# Altium PCB PCB1.PcbDoc
Units mil, origin at the board's own origin, x right, y up, seen from the top; angles counter-clockwise.
Board outline 2265.03 x 1595.03 mil, 2 copper layers (Top Layer, Bottom Layer); 36 components, 33 nets, 130 pads, 23 vias.
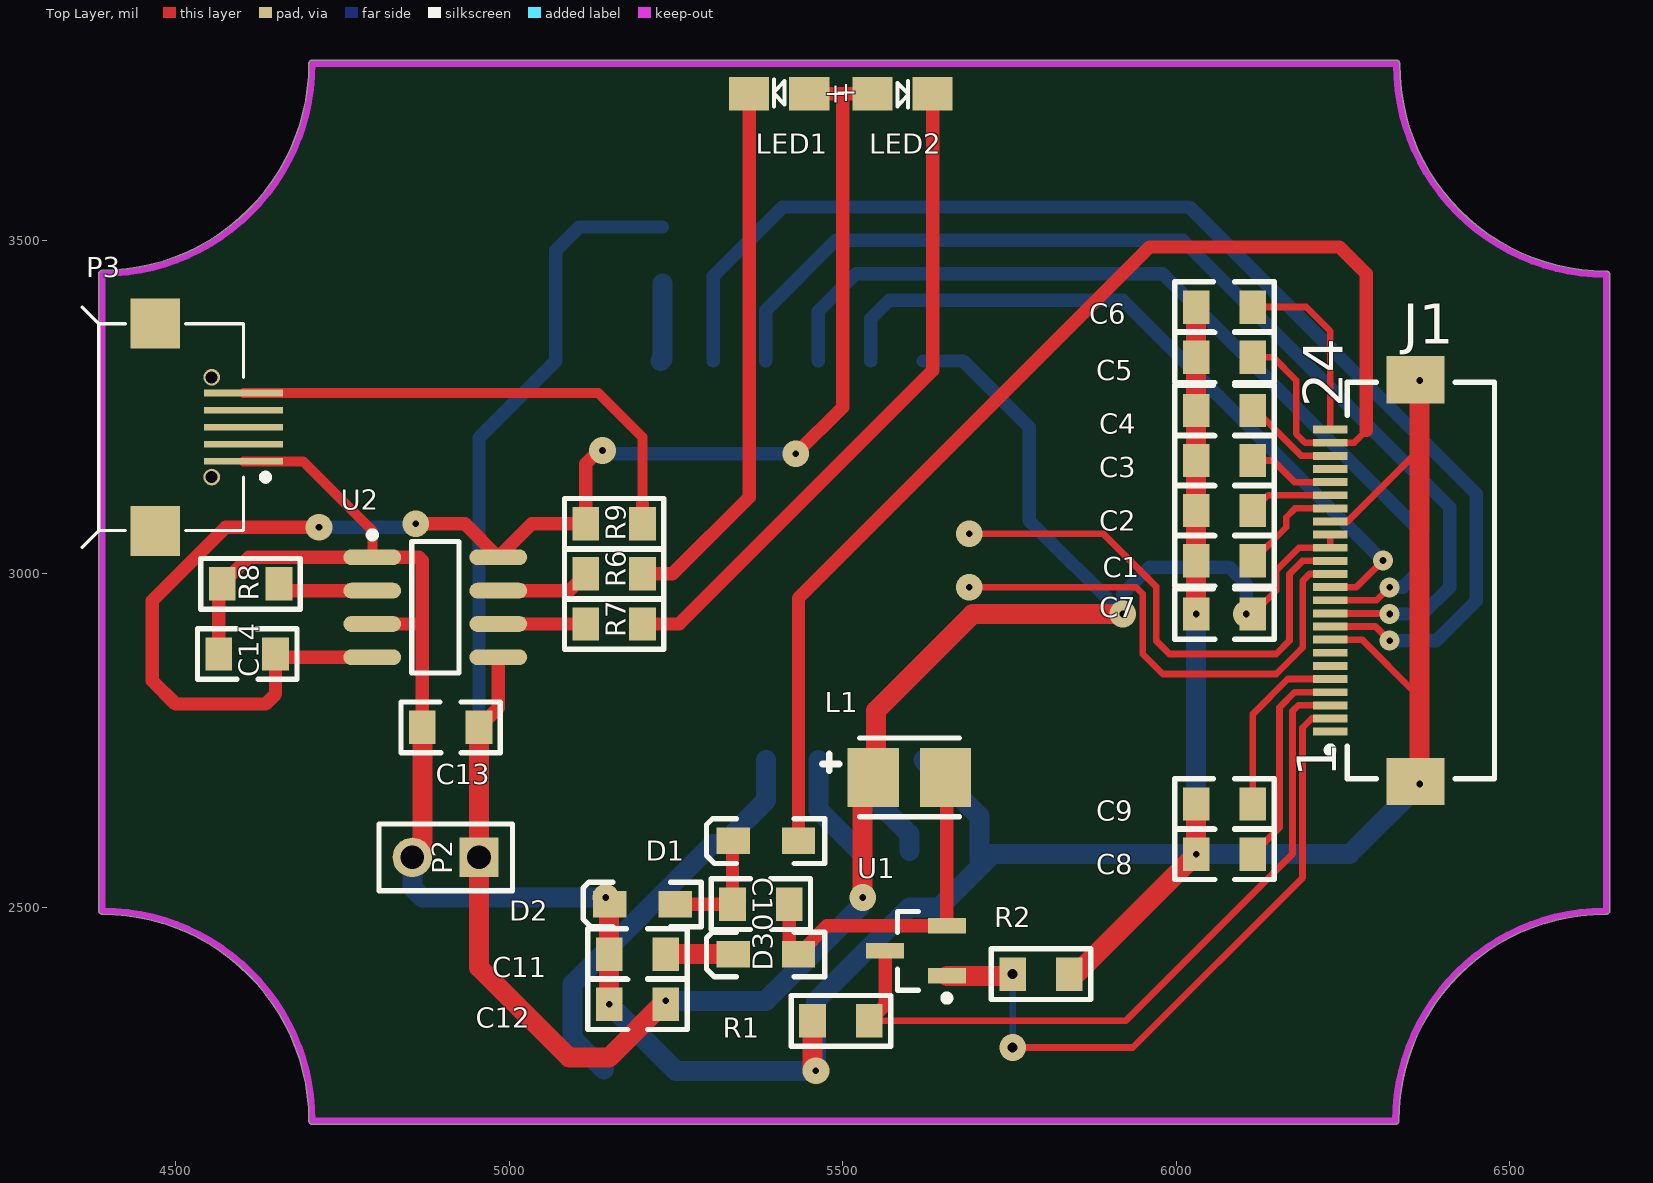
[diagram p0: Top Layer view]
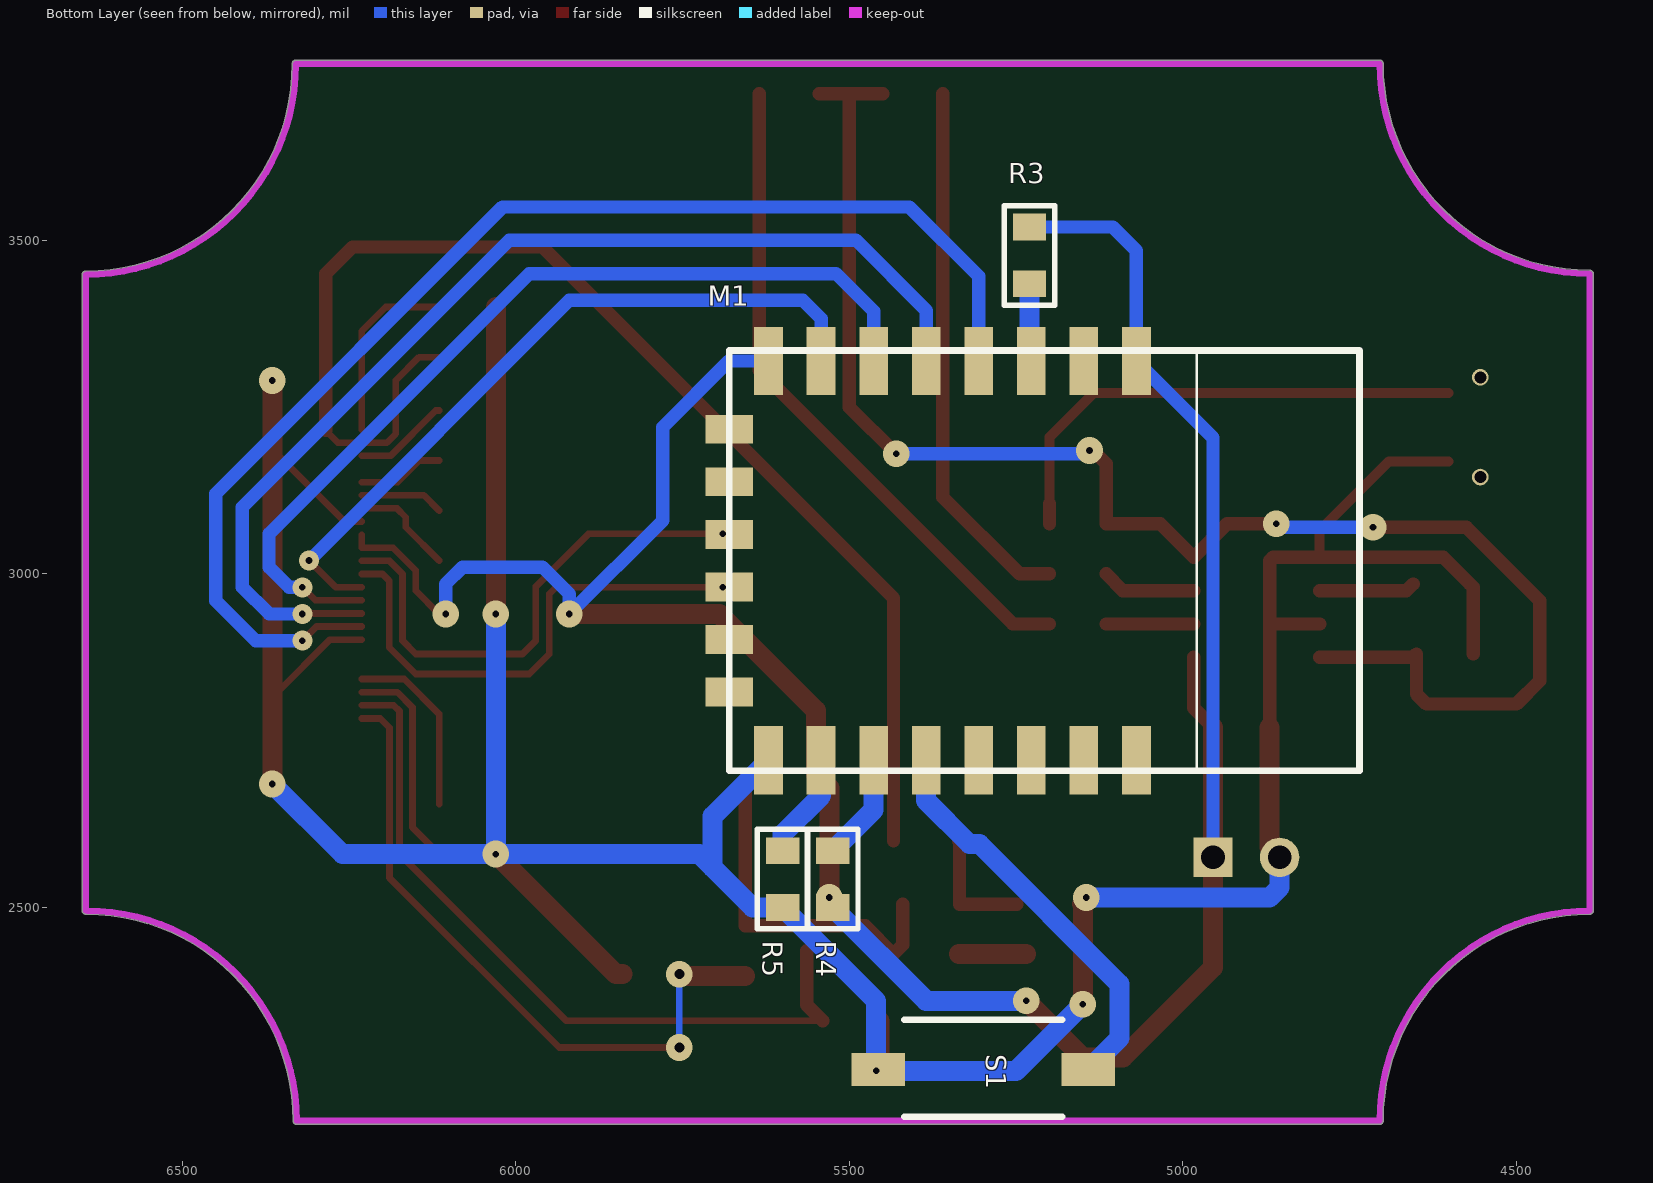
[diagram p1: Bottom Layer view, seen from below]
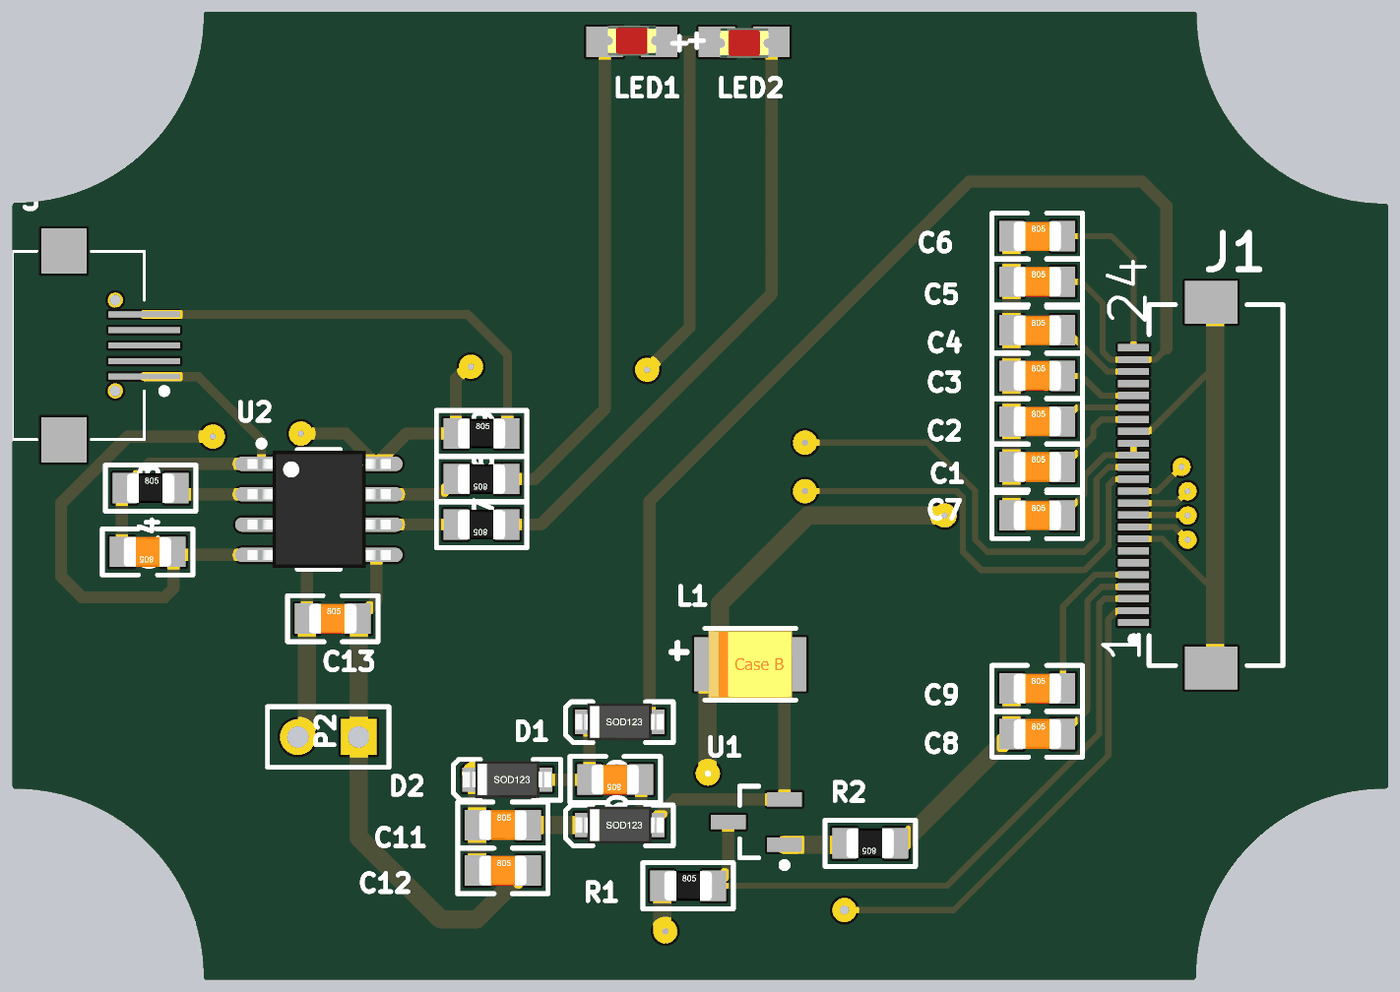
[diagram p2: 3D render of the assembled board from above, using the file's embedded part models]
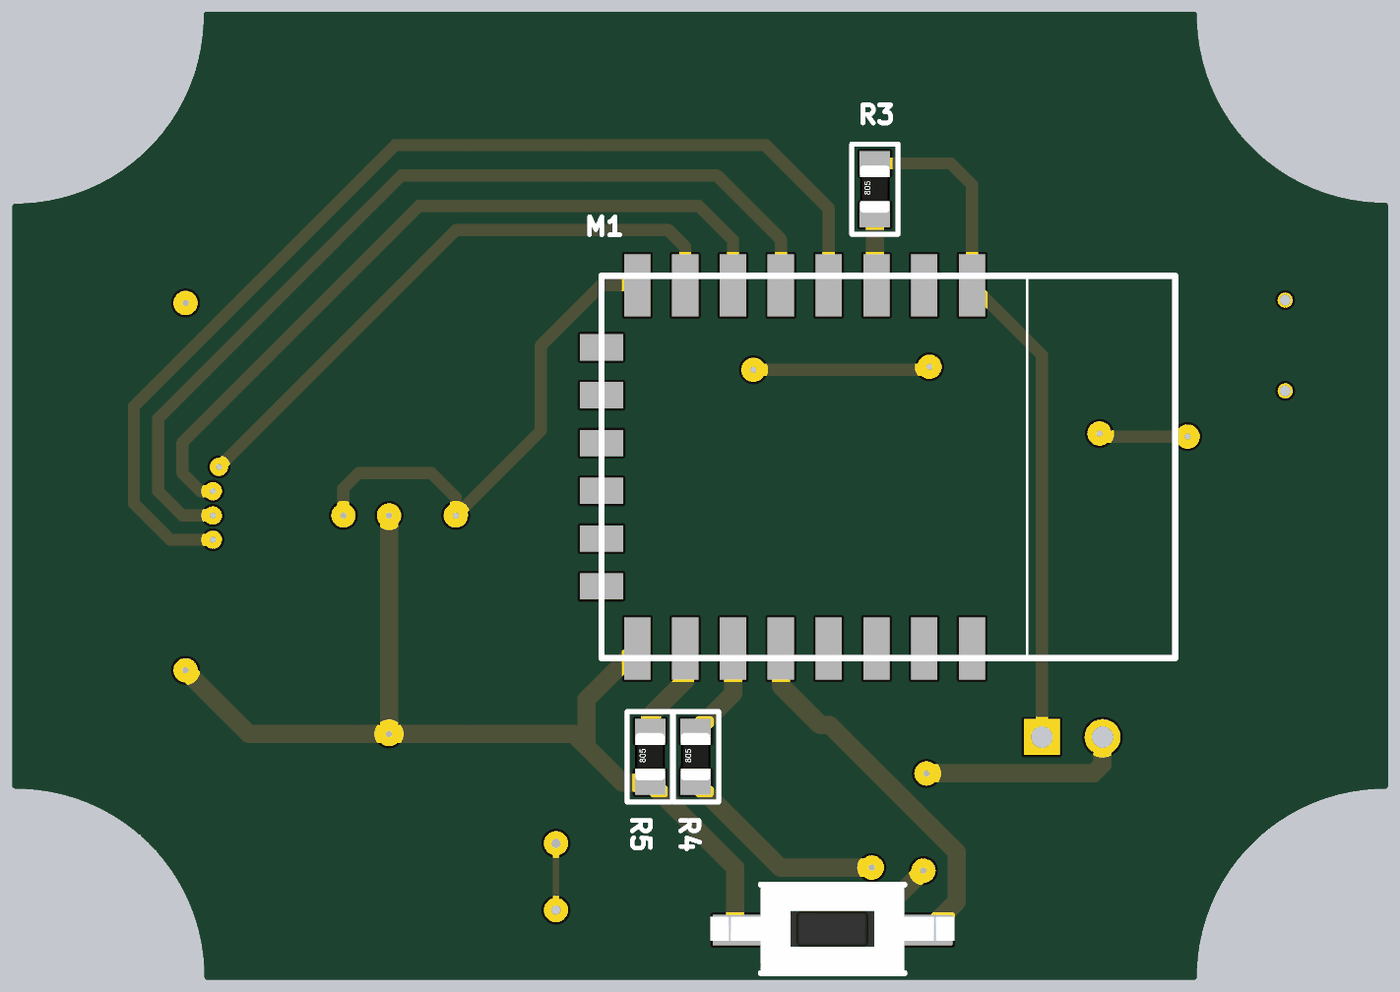
[diagram p3: 3D render of the assembled board from below, using the file's embedded part models]

## Layer stack, top to bottom
Top Solder: solder mask 0.4, Solder Resist, Dk 3.5
Top Layer: signal copper 1.4
Dielectric 1: dielectric 12.6, FR-4, Dk 4.8
Bottom Layer: signal copper 1.4
Bottom Solder: solder mask 0.4, Solder Resist, Dk 3.5

## Board outline
4384.98,2494.96 ccw(c4390,2494.96) 4390,2489.95 cw(c4390,2180) 4699.95,2180 ccw(c4704.96,2180) 4704.96,2174.99 6328.74,2174.99 ccw(c6328.74,2180) 6333.76,2180 cw(c6643.7,2180) 6643.7,2489.95 ccw(c6643.7,2494.96) 6644.35,2489.99 ccw(c6645,2494.96) 6650.02,2494.96 6650.02,3448.74 ccw(c6645,3448.74) 6645,3453.76 cw(c6645,3763.7) 6335.05,3763.7 ccw(c6330.04,3763.7) 6335.01,3764.35 ccw(c6330.04,3765) 6335.05,3765 ccw(c6330.04,3765) 6330.04,3770.01 4705,3770.01 ccw(c4705,3765) 4704.98,3770.01 ccw(c4704.96,3765) 4699.95,3765 cw(c4390,3765) 4390,3455.05 ccw(c4390,3450.04) 4384.98,3450.02 ccw(c4390,3450) 4384.98,3450

## Design rules (kind name [scope] priority, off if disabled: settings)
Clearance [All] p1: gap=5
PolygonConnect [All] p1: connectstyle=Relief reliefconductorwidth=10 reliefentries=4 polygonreliefangle="90 Angle" airgapwidth=10
RoutingVias [All] p1: holewidth=28 width=50 viastyle="Through Hole" minholewidth=28 minwidth=50 maxholewidth=28 maxwidth=50
SolderMaskExpansion [All] p1: expansion=4
Width [All] p1: maxlimit=50 minlimit=10 preferedwidth=15
30 further rules are at their usual default settings.

## Components (designator, comment, footprint, x,y, rotation, side; value= is the part's Value field where it differs from the comment)
C1 "无极性电容" 0805C 6030,3020 r0 top
C2 "无极性电容" 0805C 6030,3095 r0 top
C3 "无极性电容" 0805C 6030,3170 r0 top
C4 "无极性电容" 0805C 6030,3245 r0 top
C5 "无极性电容" 0805C 6030,3325 r0 top
C6 "无极性电容" 0805C 6030,3400 r0 top
C7 "无极性电容" 0805C 6030,2940 r0 top
C8 "无极性电容" 0805C 6030,2580 r0 top
C9 "无极性电容" 0805C 6030,2655 r0 top
C10 "无极性电容" 0805C 5420,2505 r180 top
C11 "无极性电容" 0805C 5150,2430 r0 top
C12 "无极性电容" 0805C 5150,2355 r0 top
C13 "无极性电容" 0805C 4870,2770 r0 top
C14 "无极性电容" 0805C 4650,2880 r180 top
D1 "1N5817-肖特基二极管_1" SOD123 5385,2600 r180 top
D2 "1N5817-肖特基二极管_1" SOD123 5200,2505 r180 top
D3 "1N5817-肖特基二极管_1" SOD123 5385,2430 r180 top
J1 "CL586-0555-2" FH12-24S-0.5SH 6295,2990 r90 top
L1 "Inductor" CAPM-B-3528X21N 5600,2695 r0 top
LED1 "LED-贴片-直插" LED_0805 5450,3720 r180 top
LED2 "LED-贴片-直插" LED_0805 5545,3720 r0 top
M1 "ESP-12E&F Module" "ESP-12E&F Module" 5375,3020 r270 bottom
P2 "锂电池" HDR1X2 4955,2575 r180 top
P3 "迷你USB" 迷你usb 4385,3220 r180 top
R1 "贴片电阻" 0805R 5455,2330 r0 top
R2 "贴片电阻" 0805R 5840,2400 r180 top
R3 "贴片电阻" 0805R 5230,3435 r90 bottom
R4 "贴片电阻" 0805R 5525,2500 r90 bottom
R5 "贴片电阻" 0805R 5600,2500 r90 bottom
R6 "贴片电阻" 0805R 5200,3000 r180 top
R7 "贴片电阻" 0805R 5200,2925 r180 top
R8 "贴片电阻" 0805R 4570,2985 r0 top
R9 "贴片电阻" 0805R 5115,3075 r0 top
S1 "SW-2A" SW贴片-3*6*2.5 5300,2440 r180 bottom
U1 "AO3400" AO3400 5610,2435 r180 top
U2 "TP4056" SOP8LM386 4795,3025 r0 top

## Footprints (in the part's own frame and the unit in brackets; to place one, negate y for a bottom-side part, rotate by r counter-clockwise, add the part's x,y. Pads: shape width x height; smd on the part's side, far side on the other; paste and mask are expansions set on the pad)
0805C [mil]
  rect 40x50 smd: 1(0,0) 2(85,0)
  silkscreen extent -32,-38 117,38, body extent 3,-25 82,25, height 30
0805R [mil]
  rect 40x50 smd: 1(0,0) 2(85,0)
  silkscreen extent -32,-38 117,38, body extent 3,-25 82,25, height 30
AO3400 [mm]
  rect 1.45x0.6 smd: 1(-1.175,0.95) 2(-1.175,-0.95) 3(1.175,0)
  silkscreen extent -1.3,-1.5 0.7,1.92, body extent -0.7,-1.5 0.7,1.5, height 1.1
CAPM-B-3528X21N [mm] "Molded Capacitor, 2-Leads, Body 3.50x2.80mm, IPC Medium Density"
  rect 1.95x2.25 smd: 1(-1.375,0) 2(1.375,0)
  silkscreen extent -3.3,-1.5 1.9,1.5, body extent -1.75,-1.4 1.75,1.4, height 1.9
"ESP-12E&F Module" [mm]
  rect 2.6x1.1 smd: 1(-7.6,7.75) 2(-7.6,5.75) 3(-7.6,3.75) 4(-7.6,1.75) 5(-7.6,-0.25) 6(-7.6,-2.25) 7(-7.6,-4.25) 8(-7.6,-6.25) 15(7.6,-6.25) 16(7.6,-4.25) 17(7.6,-2.25) 18(7.6,-0.25) 19(7.6,1.75) 20(7.6,3.75) 21(7.6,5.75) 22(7.6,7.75)
  rect 1.1x1.8 smd: 9(-5,-7.75) 10(-3,-7.75) 11(-1,-7.75) 12(1,-7.75) 13(3,-7.75) 14(5,-7.75)
  silkscreen extent -8,-7.75 8,16.25
FH12-24S-0.5SH [mm] "Connector; FH12 Series; 24 Position; 0.5mm Spaced Bottom Contact"
  rect 0.3x1.3 smd: 1(-5.75,1.625) 2(-5.25,1.625) 3(-4.75,1.625) 4(-4.25,1.625) 5(-3.75,1.625) 6(-3.25,1.625) 7(-2.75,1.625) 8(-2.25,1.625) 9(-1.75,1.625) 10(-1.25,1.625) 11(-0.75,1.625) 12(-0.25,1.625) 13(0.25,1.625) 14(0.75,1.625) 15(1.25,1.625) 16(1.75,1.625) 17(2.25,1.625) 18(2.75,1.625) 19(3.25,1.625) 20(3.75,1.625) 21(4.25,1.625) 22(4.75,1.625) 23(5.25,1.625) 24(5.75,1.625)
  rect 1.8x2.2 smd: 25(-7.65,-1.625) 26(7.65,-1.625)
  silkscreen extent -7.55,-4.62 7.55,1.75
HDR1X2 [mm] "Connector; Header; 2 Position"
  rect 1.5x1.5 hole 0.9: 1(0,0)
  round 1.5 hole 0.9: 2(2.54,0)
  silkscreen extent -1.27,-1.27 3.81,1.27
LED_0805 [mil]
  rect 60x50 smd: 1(0,0) 2(90,0)
  silkscreen extent 37,-21 53,19, body extent 5,-27 85,23, height 43
SOD123 [mil]
  rect 50x40 smd: 1(-49,0) 2(49,0)
  silkscreen extent -88,-33 89,34, body extent -72,-31 73,31, height 53
SOP8LM386 [mm]
  oval 2.2x0.6 smd: 1(0,0) 2(0,-1.27) 3(0,-2.54) 4(0,-3.81) 5(4.8,-3.81) 6(4.8,-2.54) 7(4.8,-1.27) 8(4.8,0)
  silkscreen extent -0.12,-4.41 3.3,0.97, body extent -0.59,-4.36 5.41,0.55, height 1.75
SW贴片-3*6*2.5 [mil] "SMT LED; 2 Flat Leads"
  rect 80x50 smd: 1(158,-183) 2(-156.96,-183)
  silkscreen extent -118,-254 119,-108, body extent -201,-250 201,-112, height 169
迷你usb [mm]
  rect 3x0.25 smd: 1(-5.508,1.3) 2(-5.508,0.65) 3(-5.508,0) 4(-5.508,-0.65) 5(-5.508,-1.3)
  round 0.635 hole 0.457 unplated: MH1(-4.3,1.9) MH2(-4.3,-1.9)
  rect 1.9x1.9 smd: ""(-2.15,3.95) ""(-2.15,-3.95)
  silkscreen extent -6.47,-4.57 0.63,4.57

## Part data
C1 C2 C3 C4 C5 C6 C7 C8 C9 C10 C11 C12 C13 C14: "Capacitor"
J1: "FH12 Series, \"Flip-Lock\" SMT/ZIF Connector - 0.5mm Spaced Top Contact"
P2: library part "Header 2", "Header, 2-Pin"
R1 R2 R3 R4 R5 R6 R7 R8 R9: "Resistor"

## Via types
v1: diameter 40, hole 10, Top Layer to Bottom Layer, 17 vias
v2: diameter 30, hole 10, Top Layer to Bottom Layer, 4 vias
v3: diameter 40, hole 15, Top Layer to Bottom Layer, 2 vias

## Nets (pads, with @x,y where several pads share a name; then routed paths per layer and width w, separated by ;. In a path a pad name is that pad's centre, name@x,y a point inside that pad or via, vN(x,y) a via of type N, cw(c..) or ccw(c..) an arc to the next point about the centre after c; other vN are vias at no path point)
BS: C1.1 C2.1 C3.1 C4.1 C5.1 C6.1 C7.1 C8.1 C9.1 C11.1 C12.1 C13.1 C14.2 D2.2 J1.8 J1.17 J1.25 J1.26 M1.15 P2.2 P3.1 R1.1 R2.1 R5.1 R8.1 S1.2 U2.1 U2.3 | length 5829.3
  Top Layer w10: J1.8 6278.58,2901.42 6358.98,2821.02 J1.25 ; J1.17 6256.98,3078.58 6358.98,3180.58 J1.26
  Top Layer w15: P3.1 4691.18,3168.82 4795,3065 U2.1
  Top Layer w20: C14.2 4565,2980 R8.1 4610,3025 U2.1 4865,3025 4870,3020 4870,2920 ; U2.3 4865,2925 4870,2920 ; C13.1 4870,2920
  Top Layer w30: P2.2 4870,2590 C13.1 ; v1(5150,2355) C11.1 5150,2504 D2.2 ; R1.1 5455,2260 v1(5460,2255) ; R2.1 5850,2400 v1(6030,2580) C9.1 ; v1(6030,2940) C1.1 C2.1 C3.1 C4.1 C5.1 C6.1 ; v1(6365,2685) v1(6365,3290)
  Bottom Layer w30: P2.2 4855,2530 4870,2515 v1(5145,2515) ; v1(5150,2355) 5250,2255 v1(5460,2255) 5460,2360 R5.1 5645,2500 5705,2560 ; M1.15 5705,2636.85 5705,2560 ; v1(6030,2940) v1(6030,2580) ; v1(6365,2685) 6260,2580 v1(6030,2580) ; 5705,2560 5725,2580 v1(6030,2580)
BUSY: J1.9 M1.4 | length 1904.5
  Top Layer w10: J1.9 6298.9,2921.1 v2(6320,2900)
  Bottom Layer w20: M1.4 5306.1,3446.1 5410,3550 6020,3550 6450,3120 6450,2960 6390,2900 v2(6320,2900)
CS: J1.12 M1.7 | length 1099.3
  Top Layer w10: J1.12 6270.16,2980.16 v2(6310,3020)
  Bottom Layer w20: M1.7 5542.32,3382.32 5570,3410 5920,3410 v2(6310,3020)
D/C: J1.11 M1.6 | length 1375.2
  Top Layer w10: J1.11 6300.47,2960.47 v2(6320,2980)
  Bottom Layer w20: M1.6 5463.58,3393.58 5520,3450 5980,3450 6370,3060 6370,3010 6340,2980 v2(6320,2980)
GDR: J1.2 R2.2 U1.1 | length 1021.9
  Top Layer w10: v3(5755,2290) 5935,2290 6189.39,2544.39 6189.39,2769.39 6203.31,2783.31 J1.2
  Top Layer w30: U1.1 5752.6,2397.6 v3(5755,2400)
  Bottom Layer w10: v3(5755,2290) v3(5755,2400)
NetC1_2: C1.2 J1.18 | length 157.2
  Top Layer w10: C1.2 6165,3070 6165,3085 6178.27,3098.27 J1.18
NetC10_2: C10.2 D1.2 D2.1 | length 181.4
  Top Layer w20: D2.1 C10.2 5335,2599 D1.2
NetC11_2: C11.2 D3.2 | length 101
  Top Layer w30: C11.2 D3.2
NetC14_1: C14.1 LED1.1 LED2.1 R9.1 U2.4 U2.8 | length 2339.1
  Top Layer w20: v1(4715,3070) 4575,3070 4465,2960 4465,2840 4500,2805 4635,2805 4650,2820 C14.1 4655,2875 U2.4 ; v1(4860,3075) 4933.98,3075 U2.8 5033.98,3075 R9.1 5115,3165 v1@5130,3180 ; v1(5430,3180) 5500,3250 5500,3720 ; LED1.1 5500,3720 ; LED2.1 5500,3720
  Bottom Layer w20: v1(4715,3070) 4855,3070 v1(4860,3075) ; v1(5140,3185) 5145,3180 v1(5430,3180)
NetLED1_2: LED1.2 R6.1 | length 812.6
  Top Layer w20: R6.1 5245,3000 5360,3115 LED1.2
NetLED2_2: LED2.2 R7.1 | length 1007.4
  Top Layer w20: R7.1 5255,2925 5635,3305 LED2.2
NetM1_3: M1.3 R3.1 | length 116.9
  Bottom Layer w30: M1.3 5230,3321.85 R3.1
NetM1_16: M1.16 R5.2 | length 159.7
  Bottom Layer w30: M1.16 5542.32,2667.68 5600,2610 R5.2
NetM1_17: M1.17 R4.2 | length 161.2
  Bottom Layer w30: M1.17 5463.58,2646.42 R4.2
NetM1_18: M1.18 S1.1 | length 612
  Bottom Layer w30: S1.1 5095,2304 5095,2385 5305,2595 5319.84,2595 5384.84,2660 M1.18
NetR6_2: R6.2 U2.7 | length 141.4
  Top Layer w20: U2.7 5090,2975 R6.2
NetR7_2: R7.2 U2.6 | length 131
  Top Layer w20: U2.6 R7.2
NetR8_2: R8.2 U2.2 | length 144.1
  Top Layer w20: R8.2 4665,2975 U2.2
PREVGH: J1.21
PREVGI: C5.2 D1.1 J1.23 | length 1962
  Top Layer w10: C5.2 6145,3325 6180,3290 6180,3210 6193.31,3196.69 J1.23 6266.69,3196.69 6285,3215
  Top Layer w20: D1.1 5434,2964 5960,3490 6245,3490 6285,3450 6285,3215
RES: J1.10 M1.5 | length 1625.9
  Top Layer w10: J1.10 6319.21,2940.79 v2(6320,2940)
  Bottom Layer w20: M1.5 5384.84,3394.84 5490,3500 6010,3500 6410,3100 6410,2980 6370,2940 v2(6320,2940)
RESE: J1.3 R1.2 U1.3 | length 1127.2
  Top Layer w10: R1.2 5924.14,2330 6174.39,2580.25 6174.39,2794.39 6182.99,2802.99 J1.3
  Top Layer w20: R1.2 5563.74,2353.74 U1.3
SCLK: J1.13 M1.12 | length 768.2
  Top Layer w10: v1(5690,2980) 5940,2980 5950,2970 5950,2880 5980,2850 6150,2850 6190,2890 6190,2990 6199.84,2999.84 J1.13
SDI: J1.14 M1.11 | length 779.5
  Top Layer w10: v1(5690,3060) 5891.21,3060 5970,2981.21 5970,2900 5990,2880 6150,2880 6170,2900 6170,3000 6189.53,3019.53 J1.14
SW: C10.1 D3.1 L1.2 U1.2 | length 544.1
  Top Layer w20: C10.1 5420,2444 D3.1 5476.4,2472.4 U1.2 5656.26,2692.87 L1.2
VCC: P3.5 R9.2 | length 755.6
  Top Layer w15: P3.5 5133.82,3271.18 5200,3205 5200,3105
  Top Layer w20: R9.2 5200,3105
VCC3.3: C7.2 C12.2 C13.2 J1.15 J1.16 L1.1 M1.1 M1.8 P2.1 R3.2 R4.1 U2.5 | length 4070.9
  Top Layer w10: C7.2 6150,2975 6150,3005 6184.21,3039.21 J1.15 J1.16
  Top Layer w20: C13.2 4983.98,2798.98 U2.5
  Top Layer w30: C13.2 P2.1 4955,2410 5090,2275 5150,2275 v1(5235,2360) ; v1(5530,2515) 5530,2679.13 L1.1 5550,2699.13 5550,2795 5695,2940 v1(5920,2940) v1@5925,2940
  Bottom Layer w20: P2.1 4955,3204.33 M1.1 5069.88,3484.88 5105,3520 R3.2 ; M1.8 5680.79,3319.21 5780,3220 5780,3080 v1(5920,2940) 5920,2970 5960,3010 6080,3010 6105,2985 v1(6105,2940)
  Bottom Layer w30: v1(5235,2360) 5385,2360 R4.1
VCOM: C6.2 J1.24 | length 278.5
  Top Layer w10: C6.2 6195,3400 6231.02,3363.98 J1.24
VGH: C9.2 J1.5 | length 272.7
  Top Layer w10: C9.2 6115,2790 6167.36,2842.36 J1.5
VGL: C8.2 J1.4 | length 322
  Top Layer w10: C8.2 6155,2620 6155,2800 6177.68,2822.68 J1.4
VPP: C2.2 J1.19 | length 125.5
  Top Layer w10: C2.2 6137.95,3117.95 J1.19
VSH: C3.2 J1.20 | length 129.4
  Top Layer w10: C3.2 6145,3170 6177.36,3137.64 J1.20
VSL: C4.2 J1.22 | length 144.2
  Top Layer w10: C4.2 6120,3245 6187.99,3177.01 J1.22
pads on no net: J1.1 J1.6 J1.7 M1.2 M1.9 M1.10 M1.13 M1.14 M1.19 M1.20 M1.21 M1.22 P3. P3.2 P3.3 P3.4 P3.MH1 P3.MH2

## Keep-outs
Keep-Out Layer:
  lines w10: 4390,3450 4390,2494.96 cw(c4390,2180) 4704.96,2180 6328.74,2180 cw(c6643.7,2180) 6643.7,2494.96 ; 4390,3450.04 ccw(c4390,3765) 4704.96,3765 ; 4705,3765 6330.04,3765 ; 6330.04,3763.7 ccw(c6645,3763.7) 6645,3448.74 6645,2494.96

## Text inside footprints (layer, text, board x,y; h text height)
J1: Top Overlay "1" at 6240,2695 h59.06 r90; Top Overlay "24" at 6250,3250 h59.06 r90
LED1: Top Overlay "+" at 5488,3734 h30 r180
LED2: Top Overlay "+" at 5507,3706 h30